# Altium PCB DriverBoard.PcbDoc
Units mm, origin at the board's own origin, x right, y up, seen from the top; angles counter-clockwise.
Board outline 100.57 x 31.4 mm, 4 copper layers (Top Layer, GNDLayer, VCCBAT, Bottom Layer), stack 0.603 mm thick; 45 components, 38 nets, 215 pads, 226 vias.
Unrouted connection lines stored in the file: 41.
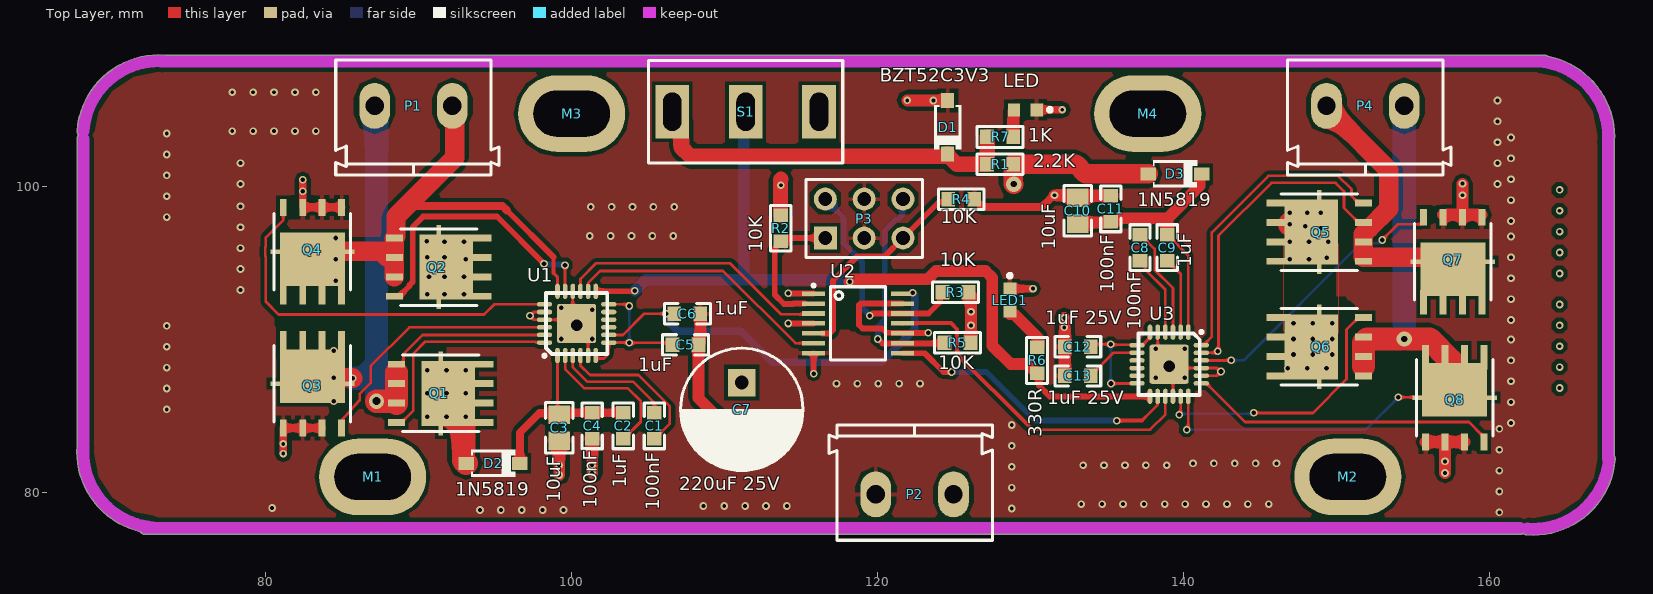
[diagram p0: Top Layer view]
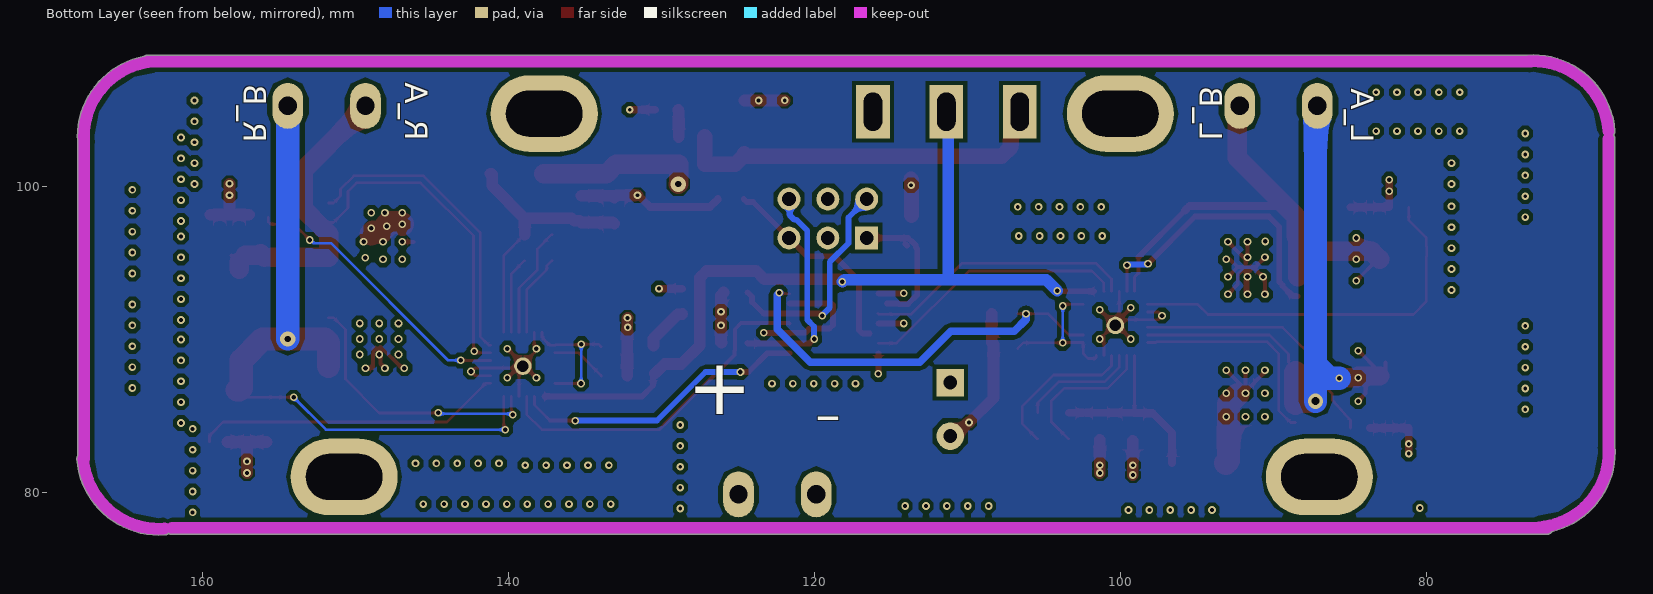
[diagram p1: Bottom Layer view, seen from below]
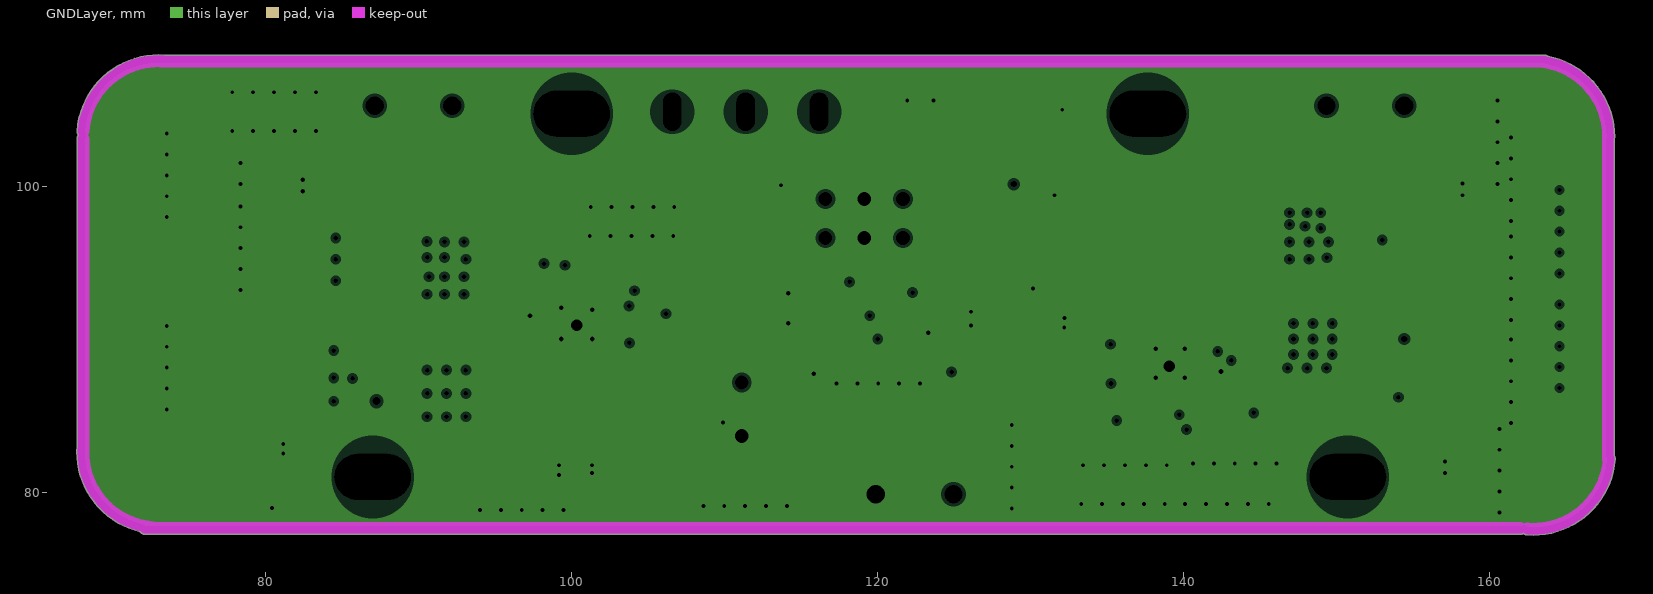
[diagram p2: GNDLayer, clearances drawn from the general rule]
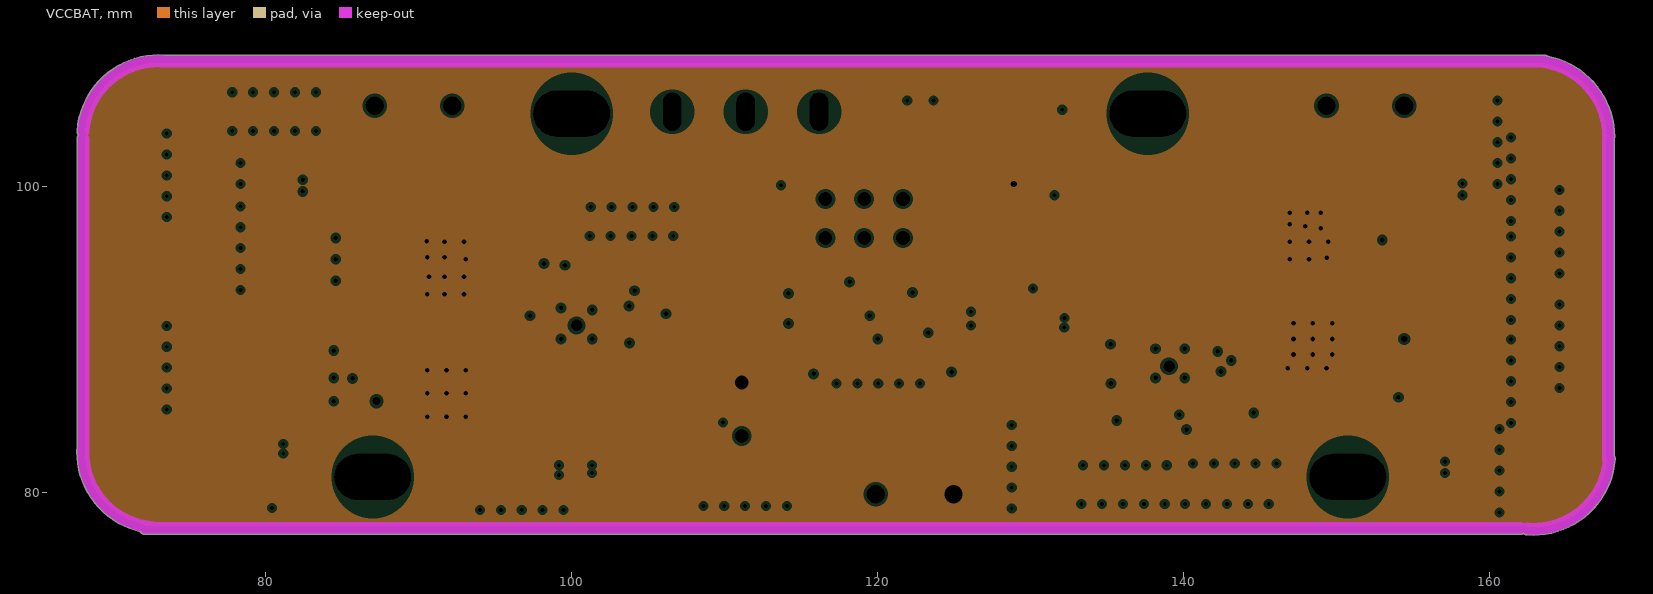
[diagram p3: VCCBAT, clearances drawn from the general rule]
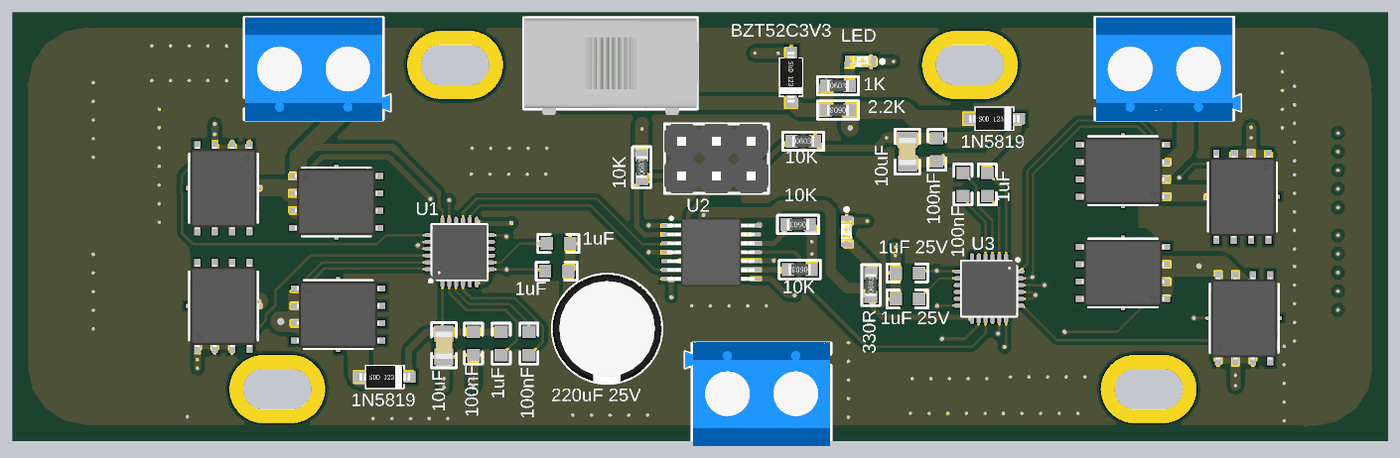
[diagram p4: 3D render of the assembled board from above, using the file's embedded part models]

## Layer stack, top to bottom
Top Solder: solder mask 0.0102, Solder Resist, Dk 3.5
Top Layer: signal copper 0.0356
Dielectric 2: prepreg 0.0711, PP-006, Dk 4.1
GNDLayer: plane copper 0.035, net GND
Dielectric 1: dielectric 0.32, FR-4, Dk 4.8
VCCBAT: plane copper 0.035, net VM
Dielectric 3: prepreg 0.0711, PP-006, Dk 4.1
Bottom Layer: signal copper 0.0356
Bottom Solder: solder mask 0.0102, Solder Resist, Dk 3.5

## Board outline
71.799,77.451 cw(c73.025,82.677) 67.672,83.073 67.672,103.124 cw(c68.072,103.124) 67.763,103.378 cw(c68.072,103.632) 67.673,103.663 cw(c73.025,103.251) 73.421,108.604 163.576,108.604 cw(c163.576,108.204) 163.816,108.525 cw(c162.814,103.251) 168.182,103.251 cw(c162.814,103.251) 168.167,102.855 168.167,82.412 cw(c167.822,82.21) 168.222,82.21 cw(c167.822,82.21) 168.221,82.179 cw(c162.869,82.591) 162.457,77.239 cw(c162.488,77.638) 162.223,77.338 cw(c161.995,77.667) 161.995,77.267 72.136,77.267 cw(c72.136,77.667)

## Design rules (kind name [scope] priority, off if disabled: settings)
Clearance [All] p1: gap=0.254 ignorepadtopadclearanceinfootprint=TRUE except(0: Arc-Hole Track-Hole SMDPad-Hole THPad-Hole Via-Hole Fill-Hole Poly-Hole Region-Hole Text-Hole)
MinimumSolderMaskSliver [All] p1: minsoldermaskwidth=0
PlaneClearance [All] p1: clearance=0.203
PlaneConnect [All] p1: planeconnectstyle=Direct reliefexpansion=0.508 reliefentries=4 reliefconductorwidth=0.254 reliefairgap=0.254
PolygonConnect [All] p1: thpad.connectstyle=Relief thpad.reliefconductorwidth=0.254 thpad.reliefentries=4 thpad.polygonreliefangle="90 Angle" thpad.airgapwidth=0.254 smdpad.connectstyle=Relief smdpad.reliefconductorwidth=0.254 smdpad.reliefentries=4 smdpad.polygonreliefangle="90 Angle" smdpad.airgapwidth=0.254 via.connectstyle=Direct via.reliefconductorwidth=0.254 via.reliefentries=4 via.polygonreliefangle="90 Angle" via.airgapwidth=0.254
RoutingVias [All] p1: holewidth=0.711 width=1.27 viastyle="Through Hole" minholewidth=0.711 minwidth=1.27 maxholewidth=0.711 maxwidth=1.27
SolderMaskExpansion [All] p1: expansion=0.102 istentingtop=FALSE
Width [All] p1: maxlimit=1.524 minlimit=0.178 preferedwidth=0.254
27 further rules are at their usual default settings.

## Components (designator, comment, footprint, x,y, rotation, side; value= is the part's Value field where it differs from the comment)
C1 "100nF" CAPC1608[0603]S-N 105.41,84.367 r90 top
C2 "1uF" CAPC1608[0603]S-N 103.378,84.367 r90 top
C3 "10uF" CAPC2012[0805]S-N 99.187,84.24 r270 top
C4 "100nF" CAPC1608[0603]S-N 101.346,84.367 r270 top
C5 "1uF" CAPC1608[0603]S-N 107.442,89.662 r180 top
C6 "1uF" CAPC1608[0603]S-N 107.569,91.694 r180 top
C7 "220uF 25V" CAPPR3.5-8X11.5 111.125,85.443 r270 top value=220uF
C8 "100nF" CAPC1608[0603]S-N 137.16,96.012 r90 top
C9 "1uF" CAPC1608[0603]S-N 138.938,96.012 r90 top
C10 "10uF" CAPC2012[0805]S-N 133.096,98.425 r90 top
C11 "100nF" CAPC1608[0603]S-N 135.255,98.552 r90 top
C12 "1uF 25V" CAPC1608[0603]S-N 133.096,89.535 r0 top value=1uF
C13 "1uF 25V" CAPC1608[0603]S-N 133.096,87.63 r0 top value=1uF
D1 "BZT52C3V3" SOD-123-L 124.587,103.886 r270 top
D2 "1N5819" SOD-123-L 94.869,81.915 r0 top
D3 "1N5819" SOD-123-L 139.446,100.838 r0 top
LED "" LEDC1608(0603) 129.667,105.029 r180 top (schematic designator LED?)
LED1 "Blue" LEDC1608(0603) 128.651,92.583 r270 top
M1 "MountHole" M3-MountSlot 86.559,80.447 r0 top
M2 "MountHole" M3-MountSlot 150.313,80.447 r0 top
M3 "MountHole" M3-MountSlot 99.568,104.196 r0 top
M4 "MountHole" M3-MountSlot 137.232,104.196 r0 top
P1 "KF/WJ/DG 30x connecter" "KF/WJ/DG 301-2p-5.0mm" 89.662,105.283 r180 top
P2 "KF/WJ/DG 30x connecter" "KF/WJ/DG 301-2p-5.0mm" 122.428,79.883 r0 top
P3 "Header 3X2" HDR2X3 116.586,96.647 r0 top
P4 "KF/WJ/DG 30x connecter" "KF/WJ/DG 301-2p-5.0mm" 151.892,105.283 r180 top
Q1 "TPH1R403NL" DFN5x6 91.448,86.487 r270 top
Q2 "TPH1R403NL" DFN5x6 91.313,94.742 r270 top
Q3 "TPH1R403NL" DFN5x6 83.058,87.122 r0 top
Q4 "TPH1R403NL" DFN5x6 83.058,95.75 r180 top
Q5 "TPH1R403NL" DFN5x6 148.865,97.028 r90 top
Q6 "TPH1R403NL" DFN5x6 148.865,89.535 r90 top
Q7 "TPH1R403NL" DFN5x6 157.607,95.106 r180 top
Q8 "TPH1R403NL" DFN5x6 157.734,86.212 r0 top
R1 "2.2K" RESC1608[0603]S-N 128.016,101.473 r180 top
R2 "10K" RESC1608[0603]S-N 113.665,97.282 r90 top
R3 "10K" RESC1608[0603]S-N 125.095,93.091 r180 top
R4 "10K" RESC1608[0603]S-N 125.476,99.187 r0 top
R5 "10K" RESC1608[0603]S-N 125.222,89.789 r180 top
R6 "330R" RESC1608[0603]S-N 130.429,88.646 r90 top
R7 "1K" RESC1608[0603]S-N 128.016,103.251 r0 top
S1 "SW-SPDT" SS12D10 111.379,104.902 r180 top
U1 "DRV8701E" QFN24-4x4 100.33,91.059 r90 top
U2 "SN74HC125PWR" TSSOP-14 118.724,91.059 r0 top
U3 "DRV8701E" QFN24-4x4 139.065,88.392 r270 top

## Footprints (in the part's own frame and the unit in brackets; to place one, negate y for a bottom-side part, rotate by r counter-clockwise, add the part's x,y. Pads: shape width x height; smd on the part's side, far side on the other; paste and mask are expansions set on the pad)
CAPC1608[0603]S-N [mm]
  rect 0.9x0.95 smd: 1(-0.85,0) 2(0.85,0)
  silkscreen extent -1.5,-0.66 1.5,0.66, body extent -0.8,-0.41 0.8,0.41, height 0.79
CAPC2012[0805]S-N [mm]
  rect 1.2x1.4 smd: 1(-0.85,0) 2(0.85,0)
  silkscreen extent -1.65,-0.9 1.65,0.9, body extent -1,-0.63 1,0.62, height 1.25
CAPPR3.5-8X11.5 [mm]
  rect 1.8x1.8 hole 0.9: 1(-1.75,0)
  round 1.8 hole 0.9: 2(1.75,0)
  silkscreen extent -4,-4.01 4,4, body extent -4,-3.98 4,3.98, height 11.5
DFN5x6 [mm]
  rect 0.45x1.6 smd: 1(-1.905,2.65) 1(-0.635,2.65) 1(0.635,2.65) 1(1.905,2.65)
  rect 5.5x0.3 smd: 1(0,0)
  rect 4.25x3.5 smd: 1(0,0.5)
  rect 0.45x1.1 smd: 2(1.905,-2.9) 3(-1.905,-2.9) 3(-0.635,-2.9) 3(0.635,-2.9)
  silkscreen extent -2.5,-2.5 2.5,2.5, body extent -2.45,-3 2.45,3, height 1
HDR2X3 [mm]
  rect 1.5x1.5 hole 0.9: 1(0,0)
  round 1.5 hole 0.9: 2(0,2.54) 3(2.54,0) 4(2.54,2.54) 5(5.08,0) 6(5.08,2.54)
  silkscreen extent -1.27,-1.27 6.35,3.81, body extent -1.27,-1.27 6.35,3.81, height 8.54
"KF/WJ/DG 301-2p-5.0mm" [mm]
  oval 2x3 hole 1.2: 1(2.54,0) 2(-2.54,0)
  silkscreen extent -5.6,-3 5.08,4.52, body extent -5.6,-3 5,4.6, height 10
LEDC1608(0603) [mm]
  rect 0.8x0.85 smd: A(0.75,0) C(-0.75,0)
  silkscreen extent -1.73,-0.12 -1.48,0.12, body extent -0.8,-0.4 0.8,0.4, height 0.64
M3-MountSlot [mm]
  oval 7x5 hole 3 slot 5 at 0 deg: 1(0.436,0.579)
QFN24-4x4 [mm]
  rrect10% 2.55x2.55 smd: 0(0,0)
  oval 1x0.3 smd: 1(-2.1,1.25) 2(-2.1,0.75) 3(-2.1,0.25) 4(-2.1,-0.25) 5(-2.1,-0.75) 6(-2.1,-1.25) 13(2.1,-1.25) 14(2.1,-0.75) 15(2.1,-0.25) 16(2.1,0.25) 17(2.1,0.75) 18(2.1,1.25)
  oval 0.3x1 smd: 7(-1.25,-2.1) 8(-0.75,-2.1) 9(-0.25,-2.1) 10(0.25,-2.1) 11(0.75,-2.1) 12(1.25,-2.1) 19(1.25,2.1) 20(0.75,2.1) 21(0.25,2.1) 22(-0.25,2.1) 23(-0.75,2.1) 24(-1.25,2.1)
  silkscreen extent -2.21,-2 2,2.21, body extent -2,-2 2,2, height 0.9
RESC1608[0603]S-N [mm]
  rect 0.9x0.95 smd: 1(-0.85,0) 2(0.85,0)
  silkscreen extent -1.5,-0.67 1.5,0.67, body extent -0.8,-0.4 0.8,0.4, height 0.45
SOD-123-L [mm]
  rect 1x0.85 smd: A(-1.75,0) K(1.75,0)
  silkscreen extent -1.45,-0.9 1.47,0.9, body extent -1.85,-0.8 1.85,0.8, height 1.2
SS12D10 [mm]
  rect 2.2x3.5 hole 1.2 slot 2.5 at 90 deg mask+0.07: 1(-4.8,0) 2(0,0) 3(4.8,0)
  silkscreen extent -6.35,-3.35 6.35,3.35, body extent -6.4,-3.3 6.35,3.8, height 12.5
TSSOP-14 [mm]
  rect 1.5x0.3 smd mask+0.07: 1(-2.9,1.95) 2(-2.9,1.3) 3(-2.9,0.65) 4(-2.9,0) 5(-2.9,-0.65) 6(-2.9,-1.3) 7(-2.9,-1.95) 8(2.9,-1.95) 9(2.9,-1.3) 10(2.9,-0.65) 11(2.9,0) 12(2.9,0.65) 13(2.9,1.3) 14(2.9,1.95)
  silkscreen extent -2.99,-2.4 1.8,2.57, body extent -3.2,-2.5 3.2,2.5, height 1.13

## Part data
C1 C4 C8 C11: library part Cap-Chip_1, "贴片电容", Tolerance=±10%, Voltage=50V, Price(RMB)=0.000, Published=8-Jun-2000, Publisher="Altium Limited", Revision="July-2002: Re-released for DXP Platform."
C2 C5 C6 C9 C12 C13: library part Cap-Chip_2, "贴片电容", Tolerance=±10%, Voltage=25V, Price(RMB)=0.000, Published=8-Jun-2000, Publisher="Altium Limited", Revision="July-2002: Re-released for DXP Platform."
C3 C10: library part Cap-Chip, "贴片电容", Tolerance=±10%, Voltage=25V, Price(RMB)=0.000, Published=8-Jun-2000, Publisher="Altium Limited", Revision="July-2002: Re-released for DXP Platform."
C7: library part Cap-Elect, "Polarized Capacitor (Radial)", Voltage=25V, Price(RMB)=0.000, Published=8-Jun-2000, Publisher="Altium Limited", Revision="July-2002: Re-released for DXP Platform."
D1: library part "Diode Zen", "3.3V稳压二极管 SOD-123", Price(RMB)=0.000, Published=8-Jun-2000, Publisher="Altium Limited", Revision="July-2002: Re-released for DXP Platform."
D2 D3: library part "Diode Schottky", "肖特基二极管 Diode", Imax=500mA, PartNumber=1N5819, Price(RMB)=0.000, Published=8-Jun-2000, Publisher="Altium Limited", Revision="July-2002: Re-released for DXP Platform."
LED: library part "LED Chip Red", "Typical Chip LED", Price(RMB)=0.00, Published=8-Jun-2000, Publisher="Altium Limited", Revision="July-2002: Re-released for DXP Platform."
LED1: library part "LED Chip Blue", "Typical Chip LED", Color=Blue, Price(RMB)=0.00, Published=8-Jun-2000, Publisher="Altium Limited", Revision="July-2002: Re-released for DXP Platform."
M1 M2 M3 M4: "固定孔"
P1 P2 P4: library part "KF/WJ/DG 30x", "接线端子 2Pin"
P3: "Header, 3-Pin, Dual row", LatestRevisionDate=17-Jul-2002, LatestRevisionNote="Re-released for DXP Platform.", Price(RMB)=0.00, Publisher="Altium Limited"
Q1 Q2 Q3 Q4 Q5 Q6 Q7 Q8: "东芝 N沟 MOS"
R1: library part Res-Chip, "贴片电阻", Tolerance=±1%, Price(RMB)=0.000, Published=8-Jun-2000, Publisher="Altium Limited", Revision="July-2002: Re-released for DXP Platform."
R2 R3 R4 R5: library part Res-Chip_1, "贴片电阻", Tolerance=±1%, Price(RMB)=0.000, Published=8-Jun-2000, Publisher="Altium Limited", Revision="July-2002: Re-released for DXP Platform."
R6: library part Res-Chip_3, "贴片电阻", Tolerance=±1%, Price(RMB)=0.000, Published=8-Jun-2000, Publisher="Altium Limited", Revision="July-2002: Re-released for DXP Platform."
R7: library part Res-Chip_2, "贴片电阻", Tolerance=±1%, Price(RMB)=0.000, Published=8-Jun-2000, Publisher="Altium Limited", Revision="July-2002: Re-released for DXP Platform."
S1: "单刀双掷开关 3脚船型、钮子、拨动开关 SPDT Subminiature Toggle Switch", Price(RMB)=0.000, Published=24-Mar-1999, Publisher="Altium Limited"
U1 U3: "DRV8701E Ti全桥驱动芯片"
U2: "三态输出的四路缓冲器 TSSOP-20"

## Free pads (board coordinates)
  round 1.143 hole 0.762: ""(100.33,90.932) ""(139.065,88.265)

## Via types
v1: diameter 0.5, hole 0.254, Top Layer to Bottom Layer, tented both sides, 134 vias
v2: diameter 0.5, hole 0.3, Top Layer to Bottom Layer, tented both sides, 89 vias
v3: diameter 1, hole 0.4, Top Layer to Bottom Layer, tented both sides, 2 vias
v4: diameter 1, hole 0.527, Top Layer to Bottom Layer, tented both sides, 1 vias

## Nets (pads, with @x,y where several pads share a name; then routed paths per layer and width w, separated by ;. In a path a pad name is that pad's centre, name@x,y a point inside that pad or via, vN(x,y) a via of type N, cw(c..) or ccw(c..) an arc to the next point about the centre after c; other vN are vias at no path point)
3V3: D1.K R1.2 R7.1 S1.3 | length 25
  Top Layer w1.016: S1.3 107.171,104.31 107.171,102.576 107.766,101.981 124.432,101.981 D1.K 124.631,102.092 124.631,102.017 125.175,101.473 127.097,101.473 R1.2 R7.1
DVDD: C6.2 U1.8 U2.14 | length 26.7
  Top Layer w0.178: U1.8 103.349,90.309 104.734,91.694 C6.2 ; U2.14 122.21,93.009 122.271,93.07 122.292,93.07 v2(122.296,93.073)
  Bottom Layer w0.508: v2(106.172,91.694) 106.172,91.313 106.934,90.551 111.097,90.551 113.129,88.519 120.269,88.519 122.428,90.678 122.428,92.941 v2(122.296,93.073)
GND: C3.2 C4.2 C5.1 C6.1 C7.2 C10.2 C11.2 C12.1 C13.1 D1.A LED1.C LED.C P2.2 P3.3 P3.4 pad. Q3.3 Q4.3 Q7.3 Q8.3 R2.2 R3.1 R4.2 R5.1 U1.0 U1.5 U1.16 U1.20 U1.21 U2.1 U2.4 U2.7 U2.10 U2.13 U3.0 U3.5 U3.16 U3.20 U3.21 | length 96
  Top Layer w0.178: U1.20 97.535,91.809 97.393,91.667 97.382,91.667 v2(97.282,91.567) 97.282,91.562 97.535,91.309 U1.21 100.08,91.309 U1.16 ; U1.0@100.371,91.018 v2(101.346,90.043) ; U1.5 U1.0@101.08,90.184 ; v1(130.163,93.333) v1@130.175,93.345 ; 131.263,99.187 131.517,99.441 v1(131.572,99.441) ; v2(138.176,89.408) 138.308,89.276 138.308,89.149 U3.0 ; U3.0@138.315,89.276 U3.5 ; U3.16 139.315,88.142 U3.21 142.184,88.142 142.328,87.998 142.376,87.998 v2(142.458,87.916) 142.183,87.642 U3.20
  Top Layer w0.254: v2(99.314,90.043) 100.289,91.018 100.34,91.018 U1.0@100.34,91.049 ; v2(99.314,92.075) 100.08,91.309 U1.0 ; U1.0@100.371,91.018 100.414,91.018 101.344,91.948 v2(101.346,91.948) ; v2(138.176,87.503) U3.0 ; v2(140.081,87.503) 139.442,88.142 139.315,88.142 U3.0 ; v2(140.081,89.408) U3.0
  Top Layer w0.381: v2(114.173,91.059) U2.4 ; v2(114.173,93.024) 114.18,93.016 115.817,93.016 U2.1 ; v2(115.824,87.761) U2.7 ; U2.13 118.901,92.359 118.797,92.255 118.797,90.961 119.02,90.737 120.303,90.737 120.591,90.449 121.583,90.449 U2.10 121.646,90.431 123.295,90.431 v2(123.317,90.453)
  Top Layer w0.508: v1(81.153,82.55) 81.153,84.222 82.423,84.222 Q3.3@83.693,84.222 ; v2(82.423,100.457) 82.423,98.65 83.693,98.65 Q4.3@84.963,98.65 ; R4.2 126.326,99.162 126.522,98.966 126.547,98.966 126.834,98.679 130.755,98.679 131.263,99.187 ; LED1.C v1(130.163,93.333) ; LED.C v1(132.08,105.029)
  Top Layer w0.762: v1(99.187,81.153) C3.2 ; v1(101.346,81.28) C4.2@101.346,83.448 ; C6.1 108.419,89.814 108.292,89.687 C5.1 108.292,86.188 v1(109.898,84.582) 109.955,84.582 110.844,83.693 C7.2 ; v1(121.941,105.643) 121.948,105.636 D1.A ; R3.1 125.945,93.066 126.111,92.9 126.111,89.828 R5.1 ; v1(131.572,99.441) 132.93,99.441 C10.2 133.223,99.402 C11.2 ; v1@132.207,91.44 132.246,91.401 C12.1 C13.1 ; Q8.3@155.829,83.312 Q8.3@157.099,83.312 ; Q7.3@156.972,98.171 Q7.3@158.242,98.171 ; v1(157.099,81.28) Q8.3@157.099,83.312 ; v1(158.242,100.203) Q7.3@158.242,98.171 ; Q8.3@158.369,83.312 Q8.3@157.099,83.312 ; Q7.3@159.512,98.171 Q7.3@158.242,98.171
  Top Layer w0.991: R2.2 113.665,100.457 113.697,100.489
  other v1: 160.655,78.708 94.012,78.867 95.377,78.867 96.742,78.867 98.108,78.867 99.473,78.867 128.778,78.962 80.423,78.994 108.617,79.121 109.982,79.121 111.347,79.121 112.712,79.121 114.078,79.121 133.318,79.248 134.683,79.248 136.049,79.248 137.414,79.248 138.779,79.248 140.113,79.248 141.478,79.248 142.843,79.248 144.208,79.248 145.574,79.248 160.655,80.073 128.778,80.328 160.655,81.439 128.778,81.693 99.187,81.788 101.346,81.788 133.445,81.788 134.81,81.788 136.176,81.788 137.541,81.788 138.906,81.788 140.621,81.915 141.986,81.915 143.351,81.915 144.716,81.915 146.082,81.915 157.099,82.042 160.655,82.804 128.778,83.058 81.153,83.185 160.655,84.169 128.778,84.423 161.417,84.55 73.533,85.439 161.417,85.915 73.533,86.804 117.316,87.122 118.681,87.122 120.047,87.122 121.412,87.122 122.777,87.122 161.417,87.281 73.533,88.17 161.417,88.646 73.533,89.535 161.417,90.011 132.207,90.805 73.533,90.9 126.111,90.932 161.417,91.281 132.226,91.421 126.111,91.821 161.417,92.647 78.359,93.25 161.417,94.012 78.359,94.615 161.417,95.377 78.359,95.98 161.417,96.742 101.187,96.774 102.552,96.774 103.918,96.774 105.283,96.774 106.648,96.774 78.359,97.346 161.417,97.758 73.533,98.012 101.251,98.679 102.616,98.679 103.981,98.679 105.346,98.679 106.712,98.679 78.359,98.711 161.417,99.123 73.533,99.377 158.242,99.441 113.681,100.092 78.359,100.171 160.528,100.171 161.417,100.489 73.533,100.743 78.359,101.536 160.528,101.536 161.417,101.854 73.533,102.108 160.528,102.902 161.417,103.219 73.533,103.473 77.819,103.632 79.184,103.632 80.55,103.632 81.915,103.632 83.28,103.632 160.528,104.267 123.649,105.636 160.528,105.632 77.819,106.172 79.184,106.172 80.55,106.172 81.915,106.172 83.28,106.172
  other v2: 82.423,99.695
L_A: P1.1 Q1.3 Q3.1 U1.23 | length 42.6
  Top Layer w0.178: Q1.3@89.009,88.528 89.009,89.052 90.255,90.297 97.671,90.297 97.676,90.302 98.223,90.302 U1.23
  Top Layer w0.254: Q3.1@82.677,88.519 82.677,88.003 Q3.1@83.058,87.622 ; Q3.1@83.081,87.122 83.058,87.145 Q3.1@83.058,87.622 ; Q3.1@83.967,87.099 83.967,86.467 v2(84.455,85.979) ; v2(84.455,89.281) 83.058,87.884 Q3.1@83.058,87.622
  Top Layer w1.27: Q3.1@83.058,87.622 83.967,87.622 84.455,87.622 84.548,87.529 84.548,87.499 85.653,87.499 v2(85.685,87.467)
  Top Layer w1.524: v4(87.253,85.979) Q1.3@88.428,85.979 ; Q1.3@88.548,85.852 88.548,87.122 88.548,87.855
  Bottom Layer w1.524: v2(85.685,87.467) 86.356,87.467 87.249,88.36 ; P1.1 87.213,105.192 87.213,104.355 87.249,104.319 87.249,88.36 ; v4(87.253,85.979) 87.249,85.982 87.249,88.36
  other v2: 84.455,87.503
L_B: P1.2 Q2.3 Q4.1 U1.18 | length 36.4
  Top Layer w0.178: 98.829,94.347 99.079,94.097 99.079,93.886 ; U1.18 99.08,93.886
  Top Layer w0.254: v2(84.582,93.853) 83.185,95.25 83.058,95.25 83.581,95.773 84.455,96.647 v2(84.582,96.647) ; 98.829,94.347 98.829,95.392
  Top Layer w0.381: 95.781,98.44 98.829,95.392
  Top Layer w0.508: 89.008,98.533 89.218,98.742 95.479,98.742 95.781,98.44
  Top Layer w1.27: Q4.1@83.058,95.25 83.581,95.773 84.582,95.773 87.56,95.773 87.956,95.377 88.413,95.377 Q2.3@88.413,94.107 ; Q2.3@88.415,95.379 88.415,96.645 88.413,96.647 88.522,96.756 88.522,98.047 88.915,98.44 92.352,101.877 92.352,104.116 92.342,104.127 92.342,105.143 P1.2
  other v2: 84.582,95.25
L_EN: U1.14 U2.6 | length 17.6
  Top Layer w0.178: U1.14 101.087,93.166 101.087,93.713 101.862,94.488 109.906,94.488 114.625,89.768 U2.6@115.836,89.768
L_EN_IN: P3.5 R4.1 U2.5 | length 13.8
  Top Layer w0.381: U2.5@116.384,90.409 116.871,90.409 117.094,90.632 117.094,93.865 118.681,95.452 120.471,95.452 P3.5 124.013,98.994 124.433,98.994 R4.1
L_PH: U1.15 U2.3 | length 17.9
  Top Layer w0.178: U1.15 100.58,93.976 101.6,94.996 110.363,94.996 113.707,91.652 115.788,91.652 U2.3@115.845,91.709
L_PH_IN: P3.1 R2.1 U2.2 | length 9.1
  Top Layer w0.381: R2.1@113.942,96.139 R2.1@114.046,96.243 ; U2.2@115.264,92.359 114.502,92.359 114.473,92.329 113.885,92.329 113.284,92.931 113.284,95.949 113.38,96.046 113.38,96.172 113.64,96.432 R2.1 113.88,96.647 P3.1
NetC1_1: C1.1 U1.4 | length 10.2
  Top Layer w0.178: U1.4 100.587,88.952 100.587,88.294 101.197,87.684 104.364,87.684 106.426,85.622 106.426,84.508 105.435,83.517 C1.1
NetC1_2: C1.2 U1.3 | length 7.7
  Top Layer w0.178: U1.3 100.08,88.191 101.018,87.252 104.01,87.252 105.41,85.852 C1.2
NetC2_1: C2.1 U1.2 | length 9.6
  Top Layer w0.178: U1.2 99.58,88.08 100.839,86.821 103.679,86.821 104.521,85.979 104.521,84.635 103.403,83.517 C2.1
NetC2_2: C2.2 C3.1 C4.1 D2.K U1.1 | length 13.1
  Top Layer w0.178: U1.1 99.08,85.197 C3.1
  Top Layer w0.508: D2.K 96.619,83.919 97.897,85.197 C3.1@99.08,85.197 ; C3.1@99.187,85.217 C4.1 C2.2
NetC5_2: C5.2 U1.6 U1.7 U1.12 | length 10.1
  Top Layer w0.178: U1.6 101.58,88.829 101.636,88.773 102.108,88.773 102.43,89.095 U1.7 103.76,89.809 v2(103.78,89.789) 106.358,89.789 C5.2@106.719,89.428 ; U1.12 103.565,92.309 103.672,92.202 v2(103.759,92.202)
  Bottom Layer w0.178: v2(103.759,92.202) 103.769,92.192 103.769,89.799 v2(103.78,89.789)
NetC8_1: C8.1 U3.4 | length 5.4
  Top Layer w0.178: C8.1 137.512,94.81 137.512,94.567 138.815,93.264 U3.4
NetC8_2: C8.2 U3.3 | length 7.3
  Top Layer w0.178: C8.2 137.185,96.862 138.12,95.927 138.12,94.57 139.315,93.375 U3.3
NetC9_1: C9.1 U3.2 | length 5
  Top Layer w0.178: C9.1 138.963,95.162 139.815,94.31 U3.2
NetC9_2: C9.2 C10.1 C11.1 D3.K U3.1 | length 17.9
  Top Layer w0.178: C9.2@138.963,96.862 140.315,95.51 U3.1
  Top Layer w0.762: C10.1 133.184,97.663 C11.1@135.255,97.663 ; C11.1 135.28,97.702 135.349,97.771 135.71,97.771 135.886,97.947 138.827,97.947 138.938,97.836 C9.2 ; 138.898,97.877 141.077,100.056 141.077,100.794 141.121,100.838 D3.K
NetC12_2: C12.2 U3.6 U3.7 U3.12 | length 8.8
  Top Layer w0.178: C12.2 134.114,89.703 v2(135.241,89.703) ; v2@135.255,89.662 135.258,89.665 136.942,89.665 U3.7 137.315,89.642 137.815,90.142 U3.6 ; v2(135.265,87.132) 135.27,87.137 136.96,87.137 U3.12
  Bottom Layer w0.178: v2(135.241,89.703) 135.253,89.691 135.253,87.144 v2(135.265,87.132)
NetC13_2: C13.2 U3.8 | length 3.7
  Top Layer w0.178: C13.2 133.946,87.655 135.433,89.142 U3.8
NetLED1_A: LED1.A R6.2 | length 3.2
  Top Layer w0.178: R6.2 R6.2@130.529,89.596
  Top Layer w0.762: LED1.A@128.651,91.682 128.67,91.663 128.936,91.663 130.529,90.07 R6.2@130.529,89.596
NetLED?_A: LED.A R7.2 | length 1.8
  Top Layer w0.762: R7.2 128.866,104.953 128.917,105.004 LED.A
NetQ1_2: Q1.2 U1.24 | length 14.1
  Top Layer w0.178: Q1.2 88.873,84.582 89.653,85.362 89.653,89.085 90.433,89.865 97.627,89.865 97.676,89.816 98.223,89.816 U1.24
NetQ2_2: Q2.2 U1.17 | length 18.5
  Top Layer w0.178: v2(99.568,94.869) 99.574,94.863 99.574,93.165 U1.17
  Top Layer w0.381: Q2.2 88.738,92.837 89.408,93.507 89.408,93.575 89.618,93.786 89.618,97.365 90.297,98.044 95.123,98.044 v2(98.198,94.969)
  Bottom Layer w0.178: v2(98.198,94.969) v2@98.248,94.919 ; v2@99.518,94.919 v2(99.568,94.869)
  Bottom Layer w0.381: v2@98.248,94.919 v2@99.518,94.919
NetQ3_2: Q3.2 U1.22 | length 17.2
  Top Layer w0.178: Q3.2 84.963,84.726 85.061,84.836 85.179,84.968 86.148,86.058 86.148,86.437 86.868,87.157 86.868,88.265 89.409,90.806 98.227,90.806 U1.22
NetQ4_2: Q4.2 U1.19 | length 25.5
  Top Layer w0.178: Q4.2 81.153,97.833 80.01,96.69 80.01,96.087 79.965,96.042 79.965,95.458 80.01,95.413 80.01,92.476 80.837,91.649 94.285,91.649 94.945,92.309 U1.19
NetQ5_2: Q5.2 U3.24 | length 20.2
  Top Layer w0.178: U3.24 141.295,89.642 141.859,90.206 141.859,97.003 145.567,100.711 150.114,100.711 150.989,99.836 150.989,99.384 151.44,98.933 Q5.2
NetQ6_2: Q6.2 U3.17 | length 17.8
  Top Layer w0.178: v2(139.722,85.09) 139.722,85.177 139.815,85.27 U3.17 ; v2(144.593,85.212) 148.456,85.212 150.66,87.416 150.66,90.66 151.44,91.44 Q6.2
  Bottom Layer w0.178: v2(139.722,85.09) 139.783,85.151 144.532,85.151 v2(144.593,85.212)
NetQ7_2: Q7.2 U3.22 | length 18.6
  Top Layer w0.178: U3.22 143.125,88.642 v2(143.129,88.646) ; v2(152.991,96.516) 154.02,97.545 155.566,97.545 155.702,97.681 Q7.2
  Bottom Layer w0.178: v2(143.129,88.646) 143.942,88.646 151.603,96.307 152.726,96.307 152.934,96.516 v2(152.991,96.516)
NetQ8_2: Q8.2 U3.19 | length 20.2
  Top Layer w0.178: U3.19 141.515,87.142 144.038,84.619 158.657,84.619 159.503,83.773 159.543,83.733 Q8.2@159.543,83.326
nSLEEP: R6.1 S1.2 U1.13 U3.13 | length 54.1
  Top Layer w0.178: v2@104.072,93.159 v2@104.14,93.091
  Top Layer w0.381: U1.13@101.717,93.159 v2@104.072,93.159 ; R6.1 130.553,87.672 130.553,86.998 131.259,86.292 U3.13@137.668,86.292
  Top Layer w0.762: v2(118.173,93.777) 118.355,93.958 123.289,93.958 123.819,94.488 127.062,94.488 127.508,94.042 127.508,89.602 128.699,88.411 129.789,88.411 130.404,87.796 R6.1
  Bottom Layer w0.762: v2(104.122,93.192) 104.839,93.909 111.252,93.909 ; S1.2 111.252,104.775 111.252,93.909 ; v2(118.173,93.777) 118.042,93.909 111.252,93.909
R_A: P4.1 Q5.3 Q7.1 U3.23 | length 41.2
  Top Layer w0.178: U3.23 v2@142.06,89.142 ; v2(142.24,89.235) 142.291,89.286 142.291,96.8 145.744,100.254 149.936,100.254 150.495,99.695 150.495,98.608 151.44,97.663 Q5.3@151.765,97.663 ; Q5.3@151.765,95.123 151.765,95.377 ; Q7.1@156.21,95.631 156.21,95.451 156.358,95.303 156.358,95.123 Q7.1@156.464,95.017 ; Q7.1@157.196,95.017 Q7.1@157.348,94.864
  Top Layer w0.254: Q7.1@157.607,94.606 157.607,94.996 157.717,95.106 Q7.1@158.115,95.504
  Top Layer w1.27: P4.1@149.225,104.981 149.788,104.418 150.09,104.418 153.416,101.092 153.416,98.552 152.146,97.282 151.765,96.901 151.765,96.393 151.765,95.377 Q7.1@155.492,95.377 ; Q7.1@155.956,95.377 156.21,95.631 156.337,95.504 Q7.1@157.226,95.504 ; Q7.1@157.607,94.606 Q7.1@157.607,95.106
R_B: P4.2 Q6.3 Q8.1 U3.18 | length 46.5
  Top Layer w0.178: v2(140.208,84.118) 140.208,84.205 140.315,84.312 U3.18 ; Q6.3@151.765,87.63 151.765,88.265 ; v2(154.051,86.233) 157.557,86.233 Q8.1@157.656,86.134
  Top Layer w1.524: 151.765,88.265 151.765,88.9 151.765,89.789 152.019,90.043 156.083,90.043 157.48,88.646 157.48,86.824 157.592,86.712 Q8.1@157.734,86.712
  Bottom Layer w0.178: v2(140.208,84.118) 151.936,84.118 v2(154.051,86.233)
  Bottom Layer w1.524: v3(154.432,90.043) P4.2
R_EN: U2.8 U3.14 | length 19.5
  Top Layer w0.178: 137.279,84.709 138.308,85.738 138.308,86.285 U3.14
  Top Layer w0.254: v2(135.636,84.709) 137.279,84.709
  Top Layer w0.381: U2.8 123.087,89.109 124.312,87.884 v2(124.841,87.884)
  Bottom Layer w0.381: v2(124.841,87.884) 127.127,87.884 130.302,84.709 v2(135.636,84.709)
R_EN_IN: P3.6 R5.2 U2.9 | length 14.4
  Top Layer w0.381: v2(120.015,90.043) 120.047,90.043 120.331,89.759 U2.9 ; U2.9@121.645,89.759 124.342,89.759 R5.2
  Bottom Layer w0.381: v2(120.015,90.043) 120.038,90.066 120.038,90.86 120.471,91.294 120.471,97.142 121.171,97.842 121.315,97.842 121.61,98.136 121.61,99.131 P3.6
R_PH: U2.11 U3.15 | length 22.7
  Top Layer w0.178: 125.203,89.248 125.203,89.356 ; 129.794,84.455 130.133,84.116 137.819,84.116 138.815,85.112 U3.15
  Top Layer w0.254: U2.11 121.647,91.082 122.367,91.082 122.37,91.084 124.797,91.084 125.203,90.678 125.203,89.356 ; 125.203,89.3 125.241,89.262 125.241,89.008 129.794,84.455
R_PH_IN: P3.2 R3.2 U2.12 | length 14.5
  Top Layer w0.381: v2(119.492,91.567) 119.524,91.567 119.666,91.709 U2.12 ; U2.12@121.645,91.709 123.332,91.709 124.079,92.456 124.079,92.798 R3.2@124.372,93.091
  Bottom Layer w0.381: P3.2 117.781,97.992 117.781,96.303 118.999,95.085 118.999,92.092 119.492,91.599 v2(119.492,91.567)
VM: C7.1 D2.A D3.A P2.1 Q1.1 Q2.1 Q5.1 Q6.1 R1.1 | length 49.3
  Top Layer w0.254: v2(90.551,88.011) 90.551,87.884 Q1.1@91.821,86.614 ; v2(90.551,92.964) 90.551,93.98 v2(90.678,94.107) 91.313,94.742 91.377,94.678 Q2.1@91.563,94.492 ; v2(90.551,95.377) 91.186,94.742 91.377,94.742 91.694,94.742 Q2.1@91.813,94.742 ; v2(91.694,96.393) 91.694,95.258 91.813,95.139 Q2.1@91.813,94.742 ; Q2.1@91.813,93.853 91.813,93.083 v2(91.694,92.964) 91.694,93.083 91.694,93.853 v2(91.694,94.107) 91.694,94.361 Q2.1@91.563,94.492 ; Q2.1@91.813,94.361 Q2.1@91.813,94.742 ; v2(91.821,88.011) 91.821,86.868 Q1.1@91.821,86.614 ; Q1.1@91.948,86.614 91.948,86.868 v2(93.091,88.011) ; Q1.1@92.253,86.487 91.948,86.487 Q1.1@91.821,86.614 ; Q1.1@92.253,86.487 Q1.1@92.322,86.418 ; v2(92.964,92.964) 92.333,93.595 92.333,94.222 Q2.1@91.813,94.742 ; v2(92.964,94.107) Q2.1@92.329,94.742 ; v2(92.964,96.393) 91.813,95.242 91.813,94.861 Q2.1@91.813,94.742 ; v2(93.091,95.25) 92.837,95.25 Q2.1@92.329,94.742 ; Q5.1@146.215,96.393 v2(146.939,96.393) ; v2(146.812,88.138) 146.968,88.138 Q6.1@148.365,89.535 ; v2(147.955,97.409) Q5.1@148.068,97.296 ; v2(148.082,88.138) 148.365,88.421 Q6.1@148.365,89.535 ; v2(148.082,98.298) 148.082,97.311 148.365,97.028 148.365,96.549 v2(148.209,96.393) ; Q5.1@148.865,97.028 148.865,96.416 148.888,96.393 v2(149.479,96.393) ; v2(149.352,88.138) 148.888,88.138 148.865,88.161 148.865,89.035 148.842,89.058 148.842,89.412 148.488,89.412 Q6.1@148.365,89.535 ; Q2.1@91.563,94.492 Q2.1@91.813,94.742 ; Q2.1@91.813,94.742 Q2.1@92.329,94.742
  Top Layer w1.27: v3(128.905,100.165) 128.866,100.204 R1.1 132.964,101.473 133.599,100.838 D3.A
  Top Layer w1.524: Q1.1@92.322,86.418 92.936,85.805 92.936,82.098 D2.A ; v2(146.939,97.536) 147.062,97.659 147.734,97.659 148.365,97.028 148.844,97.028 Q5.1@148.971,96.901
  other v2: 90.551,84.963 91.821,84.963 93.091,84.963 90.551,86.487 91.821,86.487 93.091,86.487 147.193,89.027 148.463,89.027 149.733,89.027 147.193,90.043 148.463,90.043 149.733,90.043 147.193,91.059 148.463,91.059 149.733,91.059 146.939,95.25 148.209,95.25 149.377,95.352 91.694,95.377 90.542,96.421 148.971,97.282 146.939,98.298 148.971,98.298
pads on no net: M1.1 M2.1 M3.1 M4.1 S1.1 U1.9 U1.10 U1.11 U3.9 U3.10 U3.11
copper on no net:
  other v1: 164.592,86.836 164.592,88.201 164.592,89.567 164.592,90.932 164.592,92.297 164.592,94.329 164.592,95.694 164.592,97.06 164.592,98.425 164.592,99.79

## Polygon pours and split planes (outlines as drawn)
GND on Top Layer "NONET_L-01_P-001" (solid, remove dead copper, pour order 4): 71.501,108.712 71.882,108.331 165.227,108.331 165.227,108.077 167.894,105.41 167.767,105.283 167.767,80.518 164.592,77.343 71.755,77.343 68.072,81.026 68.072,105.029 67.945,105.156
VM on Top Layer "NONET_L-01_P-001" (solid, remove dead copper, pour order 0): 146.558,96.266 150.114,96.266 150.114,90.424 149.987,90.551 146.558,90.551
no net on Bottom Layer "NONET_L-01_P-001" (solid, pour order 5): 70.866,108.712 71.628,107.95 164.973,107.95 164.973,107.696 168.402,104.267 167.259,103.124 167.259,79.502 166.878,79.502 165.354,77.978 165.227,78.105 70.231,78.105 70.231,78.867 67.31,81.788 67.945,82.423 67.945,105.918
VM on VCCBAT (split plane): 73.318,108.102 73.383,108.096 73.384,108.098 73.421,108.094 163.544,108.094 163.62,108.053 163.716,108.024 163.728,108.023 163.977,107.969 164.26,107.891 164.537,107.795 164.808,107.683 165.072,107.554 165.328,107.41 165.575,107.25 165.811,107.076 166.037,106.889 166.25,106.687 166.452,106.474 166.639,106.248 166.813,106.012 166.973,105.765 167.117,105.509 167.246,105.245 167.358,104.974 167.454,104.697 167.532,104.414 167.594,104.127 167.638,103.837 167.665,103.544 167.673,103.268 167.672,103.251 167.673,103.234 167.665,102.958 167.659,102.893 167.661,102.892 167.657,102.855 167.657,82.412 167.667,82.313 167.696,82.217 167.71,82.19 167.693,82.005 167.649,81.715 167.588,81.428 167.509,81.145 167.413,80.868 167.301,80.596 167.172,80.332 167.028,80.077 166.869,79.83 166.695,79.594 166.507,79.368 166.305,79.154 166.092,78.953 165.866,78.765 165.63,78.591 165.383,78.432 165.127,78.288 164.864,78.159 164.592,78.047 164.315,77.951 164.032,77.872 163.745,77.811 163.455,77.767 163.163,77.74 162.869,77.731 162.576,77.74 162.528,77.744 162.506,77.762 162.418,77.809 162.322,77.839 162.223,77.848 162.123,77.839 162.028,77.809 161.967,77.777 72.188,77.777 72.16,77.812 72.083,77.875 71.994,77.922 71.915,77.946 71.916,77.947 71.908,77.949 71.899,77.951 71.891,77.952 71.862,77.959 71.579,78.037 71.302,78.133 71.031,78.245 70.767,78.374 70.511,78.518 70.264,78.678 70.028,78.852 69.802,79.039 69.589,79.241 69.387,79.454 69.2,79.68 69.026,79.916 68.866,80.163 68.722,80.419 68.593,80.683 68.481,80.954 68.385,81.231 68.307,81.514 68.245,81.801 68.201,82.091 68.174,82.384 68.165,82.677 68.174,82.97 68.18,83.035 68.178,83.036 68.182,83.073 68.182,103.088 68.187,103.094 68.234,103.183 68.263,103.278 68.273,103.378 68.263,103.478 68.234,103.573 68.187,103.662 68.185,103.664 68.201,103.837 68.245,104.127 68.307,104.414 68.385,104.697 68.481,104.974 68.593,105.245 68.722,105.509 68.866,105.765 69.026,106.012 69.2,106.248 69.387,106.474 69.589,106.687 69.802,106.889 70.028,107.076 70.264,107.25 70.511,107.41 70.767,107.554 71.031,107.683 71.302,107.795 71.579,107.891 71.862,107.969 72.149,108.031 72.439,108.075 72.732,108.102 73.025,108.111
GND on GNDLayer (split plane): 73.318,108.102 73.383,108.096 73.384,108.098 73.421,108.094 163.544,108.094 163.62,108.053 163.716,108.024 163.728,108.023 163.977,107.969 164.26,107.891 164.537,107.795 164.808,107.683 165.072,107.554 165.328,107.41 165.575,107.25 165.811,107.076 166.037,106.889 166.25,106.687 166.452,106.474 166.639,106.248 166.813,106.012 166.973,105.765 167.117,105.509 167.246,105.245 167.358,104.974 167.454,104.697 167.532,104.414 167.594,104.127 167.638,103.837 167.665,103.544 167.673,103.268 167.672,103.251 167.673,103.234 167.665,102.958 167.659,102.893 167.661,102.892 167.657,102.855 167.657,82.412 167.667,82.313 167.696,82.217 167.71,82.19 167.693,82.005 167.649,81.715 167.588,81.428 167.509,81.145 167.413,80.868 167.301,80.596 167.172,80.332 167.028,80.077 166.869,79.83 166.695,79.594 166.507,79.368 166.305,79.154 166.092,78.953 165.866,78.765 165.63,78.591 165.383,78.432 165.127,78.288 164.864,78.159 164.592,78.047 164.315,77.951 164.032,77.872 163.745,77.811 163.455,77.767 163.163,77.74 162.869,77.731 162.576,77.74 162.528,77.744 162.506,77.762 162.418,77.809 162.322,77.839 162.223,77.848 162.123,77.839 162.028,77.809 161.967,77.777 72.188,77.777 72.16,77.812 72.083,77.875 71.994,77.922 71.915,77.946 71.916,77.947 71.908,77.949 71.899,77.951 71.891,77.952 71.862,77.959 71.579,78.037 71.302,78.133 71.031,78.245 70.767,78.374 70.511,78.518 70.264,78.678 70.028,78.852 69.802,79.039 69.589,79.241 69.387,79.454 69.2,79.68 69.026,79.916 68.866,80.163 68.722,80.419 68.593,80.683 68.481,80.954 68.385,81.231 68.307,81.514 68.245,81.801 68.201,82.091 68.174,82.384 68.165,82.677 68.174,82.97 68.18,83.035 68.178,83.036 68.182,83.073 68.182,103.088 68.187,103.094 68.234,103.183 68.263,103.278 68.273,103.378 68.263,103.478 68.234,103.573 68.187,103.662 68.185,103.664 68.201,103.837 68.245,104.127 68.307,104.414 68.385,104.697 68.481,104.974 68.593,105.245 68.722,105.509 68.866,105.765 69.026,106.012 69.2,106.248 69.387,106.474 69.589,106.687 69.802,106.889 70.028,107.076 70.264,107.25 70.511,107.41 70.767,107.554 71.031,107.683 71.302,107.795 71.579,107.891 71.862,107.969 72.149,108.031 72.439,108.075 72.732,108.102 73.025,108.111

## Keep-outs
Keep-Out Layer:
  lines w0.8: 68.072,82.296 68.072,103.124 ; 68.072,83.058 ccw(c73.025,82.677) 72.644,77.724 ; 68.072,103.632 cw(c73.025,103.251) 73.406,108.204 ; 72.136,77.667 161.995,77.667 ; 73.152,108.204 163.576,108.204 ; 162.488,77.638 ccw(c162.869,82.591) 167.822,82.21 ; 163.195,108.204 cw(c162.814,103.251) 167.767,102.87 ; 167.767,82.21 167.767,103.505

## Other copper
Top Layer:
  pour cut-out: 112.936,97.428 113.247,97.428 113.247,97.213 113.17,97.136 112.936,97.136 112.936,97.428 114.394,97.428 114.402,97.42 114.402,97.128 114.19,97.128 114.054,97.264 114.054,97.396
  pour cut-out: 84.172,85.026 84.175,85.023 84.175,83.593 84.275,83.593 84.432,83.436 84.484,83.488 84.484,85.237 84.103,85.618
  pour cut-out: 81.632,98.39 81.79,98.39 81.886,98.486 81.944,98.428 81.944,97.846 81.632,97.846
  pour cut-out: 100.141,84.655 103.432,84.655 103.505,84.582 103.416,84.493 103.416,84.259 102.674,84.259 102.362,83.947 100.076,83.947
  pour cut-out: 149.987,92.837 150.622,92.837 150.486,92.701 150.486,92.278 150.238,92.03 150.139,92.129 149.987,92.129
  pour cut-out: 146.558,94.996 149.987,94.996 149.987,91.694 146.558,91.694
  pour cut-out: 132.95,90.264 133.242,90.264 133.223,90.245 133.223,87.138 133.242,87.119 132.95,87.119 132.95,89.662
  pour cut-out: 80.575,91.387 80.575,90.925 80.674,90.826 81.632,90.826 81.632,91.03 81.788,91.186 81.661,91.313
  pour cut-out: 107.296,90.391 107.296,88.933 107.588,88.933 107.588,90.391
  pour cut-out: 104.888,91.323 103.956,90.391 107.405,90.391 107.732,90.718 107.715,90.735 107.715,90.965 107.094,90.965 107.061,90.932
  pour cut-out: 107.423,92.423 107.715,92.423 107.95,92.188 107.95,91.2 107.715,90.965 107.423,90.965
  pour cut-out: 150.368,92.202 151.05,92.202 151.154,92.099 150.947,91.892 150.947,91.472 150.588,91.472 150.389,91.273 150.389,91.914
  pour cut-out: 150.961,94.644 150.593,94.644 150.368,94.869 150.368,96.139 150.749,96.139 151.003,95.885 151.003,95.504
  pour cut-out: 150.381,92.583 150.876,92.583 151.257,92.202 151.05,91.995 151.05,91.525
  pour cut-out: 117.575,93.072 117.594,93.091 118.953,93.091 118.364,92.502 118.364,90.678 118.237,90.551 118.156,90.632 117.575,90.632
  pour cut-out: 119.027,94.971 120.671,94.971 120.812,95.112 120.904,95.02 120.904,94.615 119.26,94.615 118.975,94.9

## Silkscreen, mask and mechanical layers (free items; w line width, h text height)
Top Overlay:
Bottom Overlay:
  text "L_B" at 95.307,102.997 h2.54 r90
  text "R_A" at 147.25,102.997 h2.54 r90
  text "L_A" at 85.401,102.87 h2.54 r90
  text "R_B" at 157.791,102.87 h2.54 r90
  text "-" at 120.015,87.329 h6.35 r180
  text "+" at 124.079,83.924 h6.35